# EAGLE board 6502__R8_EXP1 (EAGLE 7.5.0)
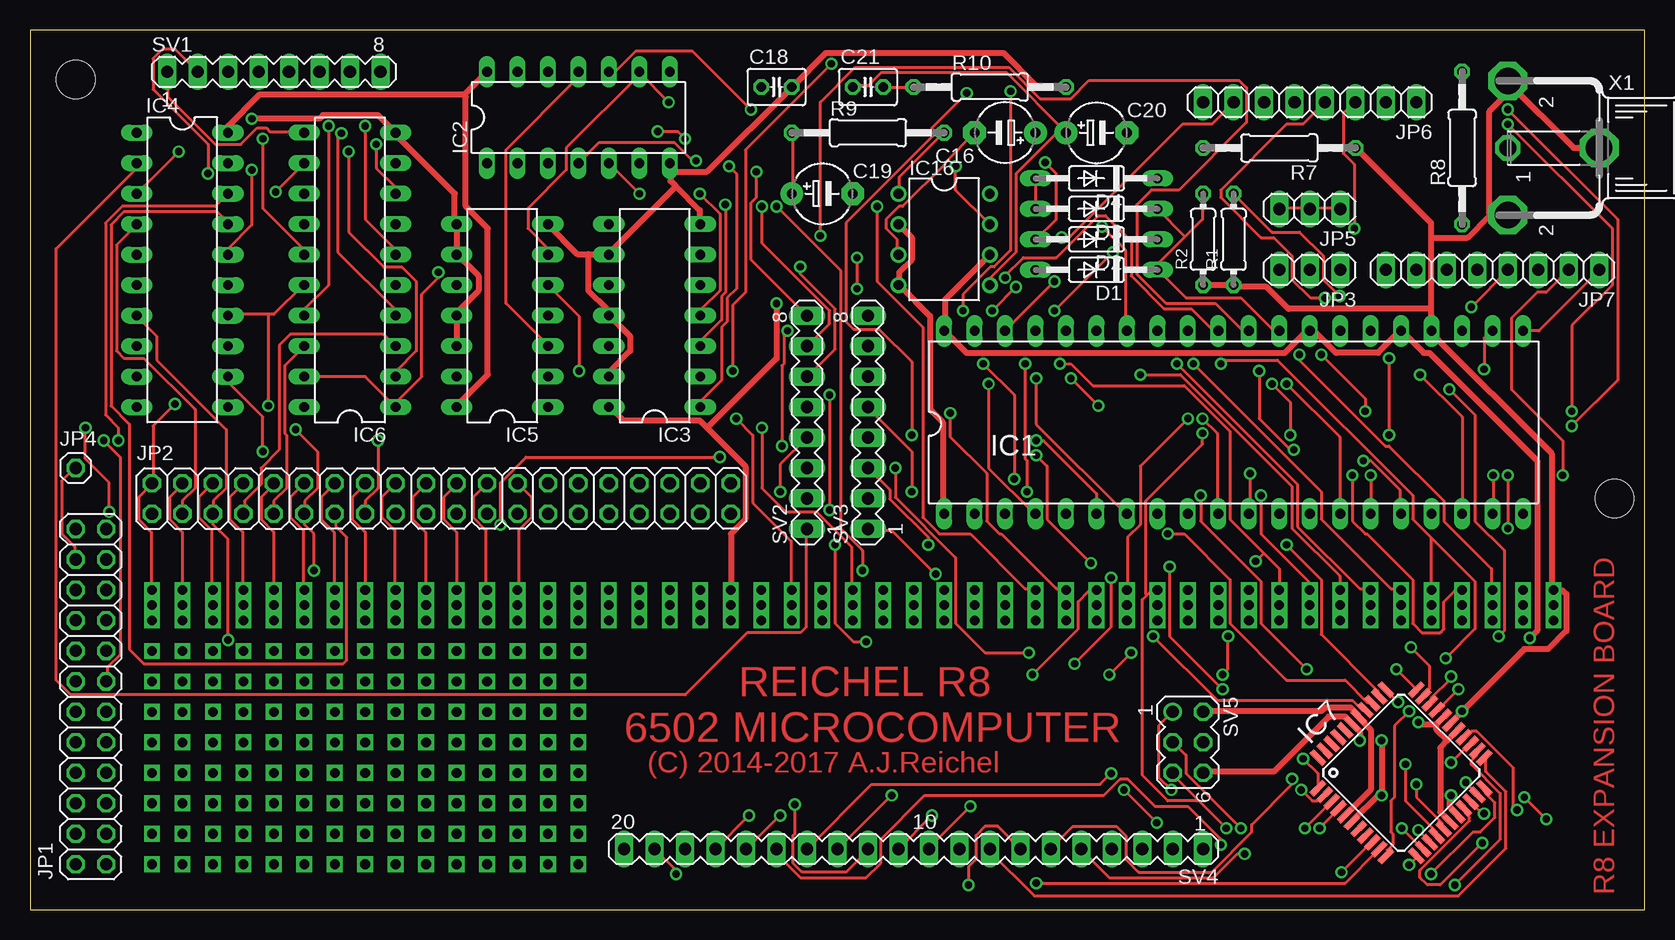
[diagram p0: board, top side]
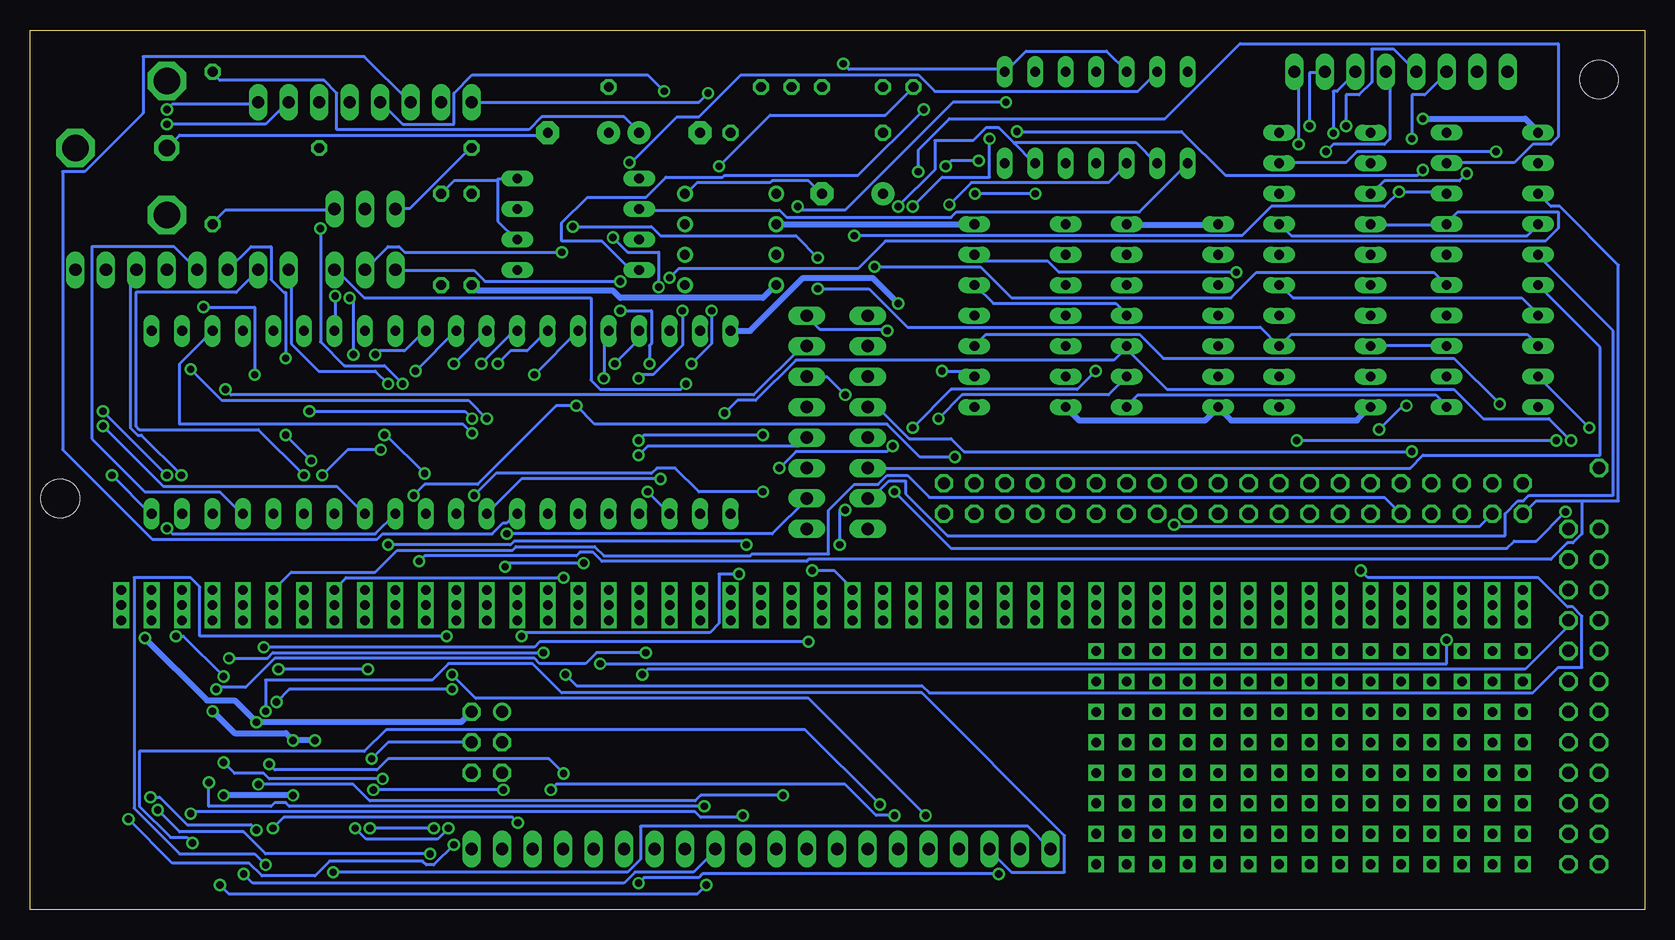
[diagram p1: board, bottom side, seen from below]

Size 134.6 x 73.33 mm. Coordinates in mm from the lower left corner, seen from the top.
Outline: 0,0 134.6,0 134.6,73.33 0,73.33 0,0
Copper layers (1*16): Top 0.035mm / dielectric 1.5mm / Bottom 0.035mm
Design rules "default *": minimum track width 10mil, minimum drill 24mil, track to track 4mil, track to pad 6mil, pad to pad 6mil, via to via 6mil, smd to smd 6mil, copper to edge 40mil, drill to drill 8mil, minimum pad ring 10mil, minimum via ring 8mil, stop-mask expansion 4mil, vias tented up to drill 0mil, thermal gap 10mil
Net classes: 1 Power: width 0.508 mm, drill 0.508 mm, clearance 0.152 mm
Holes 3.2 mm at 3.81,69.22 132.08,34.29

## Footprints (pad centres in the part's own frame; a part is rotated, then mirrored left to right if it is on the bottom)
E5-5 = drill 0.813 pad 1.905: + -2.54,0 | drill 0.813 pad 1.905 octagon: - 2.54,0
C025-030X050 = drill 0.813 octagon: 1 -1.27,0; 2 1.27,0
DO35-10 = drill 0.813 long: A 5.08,0; C -5.08,0
DIL40 = drill 0.813 long: 1 -24.13,-7.62; 2 -21.59,-7.62; 3 -19.05,-7.62; 4 -16.51,-7.62; 5 -13.97,-7.62; 6 -11.43,-7.62; 7 -8.89,-7.62; 8 -6.35,-7.62; 9 -3.81,-7.62; 10 -1.27,-7.62; 11 1.27,-7.62; 12 3.81,-7.62; 13 6.35,-7.62; 14 8.89,-7.62; 15 11.43,-7.62; 16 13.97,-7.62; 17 16.51,-7.62; 18 19.05,-7.62; 19 21.59,-7.62; 20 24.13,-7.62; 21 24.13,7.62; 22 21.59,7.62; 23 19.05,7.62; 24 16.51,7.62; 25 13.97,7.62; 26 11.43,7.62; 27 8.89,7.62; 28 6.35,7.62; 29 3.81,7.62; 30 1.27,7.62; 31 -1.27,7.62; 32 -3.81,7.62; 33 -6.35,7.62; 34 -8.89,7.62; 35 -11.43,7.62; 36 -13.97,7.62; 37 -16.51,7.62; 38 -19.05,7.62; 39 -21.59,7.62; 40 -24.13,7.62
DIL14 = drill 0.813 long: 1 -7.62,-3.81; 2 -5.08,-3.81; 3 -2.54,-3.81; 4 0,-3.81; 5 2.54,-3.81; 6 5.08,-3.81; 7 7.62,-3.81; 8 7.62,3.81; 9 5.08,3.81; 10 2.54,3.81; 11 0,3.81; 12 -2.54,3.81; 13 -5.08,3.81; 14 -7.62,3.81
DIL20 = drill 0.813 long: 1 -11.43,-3.81; 2 -8.89,-3.81; 3 -6.35,-3.81; 4 -3.81,-3.81; 5 -1.27,-3.81; 6 1.27,-3.81; 7 3.81,-3.81; 8 6.35,-3.81; 9 8.89,-3.81; 10 11.43,-3.81; 11 11.43,3.81; 12 8.89,3.81; 13 6.35,3.81; 14 3.81,3.81; 15 1.27,3.81; 16 -1.27,3.81; 17 -3.81,3.81; 18 -6.35,3.81; 19 -8.89,3.81; 20 -11.43,3.81
TQFP44 = smd 1.5 x 0.5: 1 -5.8,4; 2 -5.8,3.2; 3 -5.8,2.4; 4 -5.8,1.6; 5 -5.8,0.8; 6 -5.8,0; 7 -5.8,-0.8; 8 -5.8,-1.6; 9 -5.8,-2.4; 10 -5.8,-3.2; 11 -5.8,-4; 23 5.8,-4; 24 5.8,-3.2; 25 5.8,-2.4; 26 5.8,-1.6; 27 5.8,-0.8; 28 5.8,0; 29 5.8,0.8; 30 5.8,1.6; 31 5.8,2.4; 32 5.8,3.2; 33 5.8,4 | smd 0.5 x 1.5: 12 -4,-5.8; 13 -3.2,-5.8; 14 -2.4,-5.8; 15 -1.6,-5.8; 16 -0.8,-5.8; 17 0,-5.8; 18 0.8,-5.8; 19 1.6,-5.8; 20 2.4,-5.8; 21 3.2,-5.8; 22 4,-5.8; 34 4,5.8; 35 3.2,5.8; 36 2.4,5.8; 37 1.6,5.8; 38 0.8,5.8; 39 0,5.8; 40 -0.8,5.8; 41 -1.6,5.8; 42 -2.4,5.8; 43 -3.2,5.8; 44 -4,5.8
DIL08 = drill 0.813 pad 1.27: 1 -3.81,-3.81; 2 -1.27,-3.81; 3 1.27,-3.81; 4 3.81,-3.81; 5 3.81,3.81; 6 1.27,3.81; 7 -1.27,3.81; 8 -3.81,3.81
2X12 = drill 1.016 octagon: 1 -13.97,-1.27; 2 -13.97,1.27; 3 -11.43,-1.27; 4 -11.43,1.27; 5 -8.89,-1.27; 6 -8.89,1.27; 7 -6.35,-1.27; 8 -6.35,1.27; 9 -3.81,-1.27; 10 -3.81,1.27; 11 -1.27,-1.27; 12 -1.27,1.27; 13 1.27,-1.27; 14 1.27,1.27; 15 3.81,-1.27; 16 3.81,1.27; 17 6.35,-1.27; 18 6.35,1.27; 19 8.89,-1.27; 20 8.89,1.27; 21 11.43,-1.27; 22 11.43,1.27; 23 13.97,-1.27; 24 13.97,1.27
2X20 = drill 1.016 octagon: 1 -24.13,-1.27; 2 -24.13,1.27; 3 -21.59,-1.27; 4 -21.59,1.27; 5 -19.05,-1.27; 6 -19.05,1.27; 7 -16.51,-1.27; 8 -16.51,1.27; 9 -13.97,-1.27; 10 -13.97,1.27; 11 -11.43,-1.27; 12 -11.43,1.27; 13 -8.89,-1.27; 14 -8.89,1.27; 15 -6.35,-1.27; 16 -6.35,1.27; 17 -3.81,-1.27; 18 -3.81,1.27; 19 -1.27,-1.27; 20 -1.27,1.27; 21 1.27,-1.27; 22 1.27,1.27; 23 3.81,-1.27; 24 3.81,1.27; 25 6.35,-1.27; 26 6.35,1.27; 27 8.89,-1.27; 28 8.89,1.27; 29 11.43,-1.27; 30 11.43,1.27; 31 13.97,-1.27; 32 13.97,1.27; 33 16.51,-1.27; 34 16.51,1.27; 35 19.05,-1.27; 36 19.05,1.27; 37 21.59,-1.27; 38 21.59,1.27; 39 24.13,-1.27; 40 24.13,1.27
1X03 = drill 1.016 long: 1 -2.54,0; 2 0,0; 3 2.54,0
1X01 = drill 1.016 octagon: 1 0,0
1X08 = drill 1.016 long: 1 -8.89,0; 2 -6.35,0; 3 -3.81,0; 4 -1.27,0; 5 1.27,0; 6 3.81,0; 7 6.35,0; 8 8.89,0
0204/7 = drill 0.813 octagon: 1 -3.81,0; 2 3.81,0
0207/12 = drill 0.813 octagon: 1 -6.35,0; 2 6.35,0
MA08-1 = drill 1.016 long: 1 -8.89,0; 2 -6.35,0; 3 -3.81,0; 4 -1.27,0; 5 1.27,0; 6 3.81,0; 7 6.35,0; 8 8.89,0
MA20-1 = drill 1.016 long: 1 -24.13,0; 2 -21.59,0; 3 -19.05,0; 4 -16.51,0; 5 -13.97,0; 6 -11.43,0; 7 -8.89,0; 8 -6.35,0; 9 -3.81,0; 10 -1.27,0; 11 1.27,0; 12 3.81,0; 13 6.35,0; 14 8.89,0; 15 11.43,0; 16 13.97,0; 17 16.51,0; 18 19.05,0; 19 21.59,0; 20 24.13,0
MA03-2 = drill 1.016: 1 -2.54,-1.27 | drill 1.016 octagon: 2 -2.54,1.27; 3 0,-1.27; 4 0,1.27; 5 2.54,-1.27; 6 2.54,1.27
SOLDERPAD = drill 0.8 square: P$1 -13.97,6.35; P$2 -11.43,6.35; P$3 -8.89,6.35; P$4 -6.35,6.35; P$5 -3.81,6.35; P$6 -1.27,6.35; P$7 1.27,6.35; P$8 3.81,6.35; P$9 6.35,6.35; P$10 8.89,6.35; P$11 11.43,6.35; P$12 13.97,6.35; P$13 16.51,6.35; P$14 19.05,6.35; P$15 21.59,6.35; P$16 24.13,6.35; P$17 -16.51,6.35; P$18 -19.05,6.35; P$19 -21.59,6.35; P$20 -24.13,6.35; P$21 26.67,6.35; P$22 29.21,6.35; P$23 31.75,6.35; P$24 34.29,6.35; P$25 36.83,6.35; P$26 39.37,6.35; P$27 41.91,6.35; P$28 44.45,6.35; P$29 46.99,6.35; P$30 49.53,6.35; P$31 52.07,6.35; P$32 54.61,6.35; P$33 -24.13,3.81; P$34 -13.97,3.81; P$35 -11.43,3.81; P$36 -8.89,3.81; P$37 -6.35,3.81; P$38 -3.81,3.81; P$39 -1.27,3.81; P$40 1.27,3.81; P$41 3.81,3.81; P$42 6.35,3.81; P$43 8.89,3.81; P$44 11.43,3.81; P$45 13.97,3.81; P$46 16.51,3.81; P$47 19.05,3.81; P$48 21.59,3.81; P$49 24.13,3.81; P$50 -16.51,3.81; P$51 -19.05,3.81; P$52 -21.59,3.81; P$53 26.67,3.81; P$54 29.21,3.81; P$55 31.75,3.81; P$56 34.29,3.81; P$57 36.83,3.81; P$58 39.37,3.81; P$59 41.91,3.81; P$60 44.45,3.81; P$61 46.99,3.81; P$62 49.53,3.81; P$63 52.07,3.81; P$64 54.61,3.81; P$513 -24.13,5.08; P$514 -21.59,5.08; P$515 -19.05,5.08; P$516 -16.51,5.08; P$517 -13.97,5.08; P$518 -11.43,5.08; P$519 -8.89,5.08; P$520 -6.35,5.08; P$521 -3.81,5.08; P$522 -1.27,5.08; P$523 1.27,5.08; P$524 3.81,5.08; P$525 6.35,5.08; P$526 8.89,5.08; P$527 11.43,5.08; P$528 13.97,5.08; P$529 16.51,5.08; P$530 19.05,5.08; P$531 21.59,5.08; P$532 24.13,5.08; P$533 26.67,5.08; P$534 29.21,5.08; P$535 31.75,5.08; P$536 34.29,5.08; P$537 36.83,5.08; P$538 39.37,5.08; P$539 41.91,5.08; P$540 44.45,5.08; P$541 46.99,5.08; P$542 49.53,5.08; P$543 52.07,5.08; P$544 54.61,5.08
SOLDERPAD2 = drill 0.8 square: P$1 -27.94,7.62; P$2 -25.4,7.62; P$3 -22.86,7.62; P$4 -20.32,7.62; P$5 -17.78,7.62; P$6 -15.24,7.62; P$7 -12.7,7.62; P$8 -10.16,7.62; P$9 -7.62,7.62; P$10 -5.08,7.62; P$11 -2.54,7.62; P$12 0,7.62; P$13 2.54,7.62; P$14 5.08,7.62; P$15 7.62,7.62; P$16 -27.94,6.35; P$17 -25.4,6.35; P$18 -22.86,6.35; P$19 -20.32,6.35; P$20 -17.78,6.35; P$21 -15.24,6.35; P$22 -12.7,6.35; P$23 -10.16,6.35; P$24 -7.62,6.35; P$25 -5.08,6.35; P$26 -2.54,6.35; P$27 0,6.35; P$28 2.54,6.35; P$29 5.08,6.35; P$30 7.62,6.35; P$31 -27.94,5.08; P$32 -25.4,5.08; P$33 -22.86,5.08; P$34 -20.32,5.08; P$35 -17.78,5.08; P$36 -15.24,5.08; P$37 -12.7,5.08; P$38 -10.16,5.08; P$39 -7.62,5.08; P$40 -5.08,5.08; P$41 -2.54,5.08; P$42 0,5.08; P$43 2.54,5.08; P$44 5.08,5.08; P$45 7.62,5.08; P$46 -27.94,2.54; P$47 -25.4,2.54; P$48 -22.86,2.54; P$49 -20.32,2.54; P$50 -17.78,2.54; P$51 -15.24,2.54; P$52 -12.7,2.54; P$53 -10.16,2.54; P$54 -7.62,2.54; P$55 -5.08,2.54; P$56 -2.54,2.54; P$57 0,2.54; P$58 2.54,2.54; P$59 5.08,2.54; P$60 7.62,2.54; P$61 -27.94,0; P$62 -25.4,0; P$63 -22.86,0; P$64 -20.32,0; P$65 -17.78,0; P$66 -15.24,0; P$67 -12.7,0; P$68 -10.16,0; P$69 -7.62,0; P$70 -5.08,0; P$71 -2.54,0; P$72 0,0; P$73 2.54,0; P$74 5.08,0; P$75 7.62,0; P$76 -27.94,-2.54; P$77 -25.4,-2.54; P$78 -22.86,-2.54; P$79 -20.32,-2.54; P$80 -17.78,-2.54; P$81 -15.24,-2.54; P$82 -12.7,-2.54; P$83 -10.16,-2.54; P$84 -7.62,-2.54; P$85 -5.08,-2.54; P$86 -2.54,-2.54; P$87 0,-2.54; P$88 2.54,-2.54; P$89 5.08,-2.54; P$90 7.62,-2.54; P$91 -27.94,-5.08; P$92 -25.4,-5.08; P$93 -22.86,-5.08; P$94 -20.32,-5.08; P$95 -17.78,-5.08; P$96 -15.24,-5.08; P$97 -12.7,-5.08; P$98 -10.16,-5.08; P$99 -7.62,-5.08; P$100 -5.08,-5.08; P$101 -2.54,-5.08; P$102 0,-5.08; P$103 2.54,-5.08; P$104 5.08,-5.08; P$105 7.62,-5.08; P$106 -27.94,-7.62; P$107 -25.4,-7.62; P$108 -22.86,-7.62; P$109 -20.32,-7.62; P$110 -17.78,-7.62; P$111 -15.24,-7.62; P$112 -12.7,-7.62; P$113 -10.16,-7.62; P$114 -7.62,-7.62; P$115 -5.08,-7.62; P$116 -2.54,-7.62; P$117 0,-7.62; P$118 2.54,-7.62; P$119 5.08,-7.62; P$120 7.62,-7.62; P$121 -27.94,-10.16; P$122 -25.4,-10.16; P$123 -22.86,-10.16; P$124 -20.32,-10.16; P$125 -17.78,-10.16; P$126 -15.24,-10.16; P$127 -12.7,-10.16; P$128 -10.16,-10.16; P$129 -7.62,-10.16; P$130 -5.08,-10.16; P$131 -2.54,-10.16; P$132 0,-10.16; P$133 2.54,-10.16; P$134 5.08,-10.16; P$135 7.62,-10.16; P$136 -27.94,-12.7; P$137 -25.4,-12.7; P$138 -22.86,-12.7; P$139 -20.32,-12.7; P$140 -17.78,-12.7; P$141 -15.24,-12.7; P$142 -12.7,-12.7; P$143 -10.16,-12.7; P$144 -7.62,-12.7; P$145 -5.08,-12.7; P$146 -2.54,-12.7; P$147 0,-12.7; P$148 2.54,-12.7; P$149 5.08,-12.7; P$150 7.62,-12.7; P$151 -27.94,-15.24; P$152 -25.4,-15.24; P$153 -22.86,-15.24; P$154 -20.32,-15.24; P$155 -17.78,-15.24; P$156 -15.24,-15.24; P$157 -12.7,-15.24; P$158 -10.16,-15.24; P$159 -7.62,-15.24; P$160 -5.08,-15.24; P$161 -2.54,-15.24; P$162 0,-15.24; P$163 2.54,-15.24; P$164 5.08,-15.24; P$165 7.62,-15.24
TOBU3 = drill 1.397 octagon: 1 0,-2.54 | drill 2.21 octagon: 2 5.588,-2.54; 2@1 -5.588,-2.54; 2@2 0,5.08

## Placement (x,y rotation side)
C16  1u  [E5-5]  81.28,64.77 180 top
C18  100n  [C025-030X050]  62.23,68.58 0 top
C19  10u  [E5-5]  66.04,59.69 0 top
C20  220u  [E5-5]  88.9,64.77 0 top
C21  47n  [C025-030X050]  69.85,68.58 0 top
D1  1N4148DO35-10  [DO35-10]  88.9,53.34 180 top
D2  1N4148DO35-10  [DO35-10]  88.9,55.88 180 top
D3  1N4148DO35-10  [DO35-10]  88.9,58.42 180 top
D4  1N4148DO35-10  [DO35-10]  88.9,60.96 180 top
IC1  [DIL40]  100.33,40.64 0 top
IC2  74HCT02N  [DIL14]  45.72,66.04 0 top
IC3  74HCT04N  [DIL14]  52.07,49.53 90 top
IC4  74HCT373N  [DIL20]  12.7,53.34 270 top
IC5  74HCT02N  [DIL14]  39.37,49.53 90 top
IC6  74HCT244N  [DIL20]  26.67,53.34 90 top
IC7  MEGA32-A  [TQFP44]  114.3,11.43 45 top
IC16  LM386N-3  [DIL08]  76.2,55.88 270 top
JP1  [2X12]  5.08,17.78 90 top
JP2  [2X20]  34.29,34.29 0 top
JP3  [1X03]  106.68,53.34 180 top
JP4  [1X01]  3.81,36.83 0 top
JP5  [1X03]  106.68,58.42 180 top
JP6  [1X08]  106.68,67.31 180 top
JP7  [1X08]  121.92,53.34 180 top
R1  [0204/7]  100.33,55.88 90 top
R2  [0204/7]  97.79,55.88 90 top
R7  1k  [0207/12]  104.14,63.5 180 top
R8  10k  [0207/12]  119.38,63.5 90 top
R9  1k2  [0207/12]  69.85,64.77 0 top
R10  10R  [0207/12]  80.01,68.58 0 top
SV1  [MA08-1]  20.32,69.85 0 top
SV2  [MA08-1]  64.77,40.64 90 top
SV3  [MA08-1]  69.85,40.64 90 top
SV4  [MA20-1]  73.66,5.08 180 top
SV5  [MA03-2]  96.52,13.97 270 top
U$2  SOLDERPAD  [SOLDERPAD]  72.39,20.32 0 top
U$3  SOLDERPAD2  [SOLDERPAD2]  38.1,19.05 0 top
X1  TOBU3  [TOBU3]  125.73,63.5 270 top

## Library data of the parts
C16 C18-C21 R1 R2 R7-R10 = rcl
D1-D4 = diode
IC1 = 8Bit_Parts
IC2-IC6 = 74xx-eu
IC7 = atmel; MPN: ATMEGA32-16AU; OC_FARNELL: 9171274; OC_NEWARK: 69K6677
IC16 = linear
JP1-JP7 = pinhead
SV1-SV5 = con-lstb; OC_FARNELL: unknown; OC_NEWARK: unknown
U$2 = logik2
U$3 = logik
X1 = logik2; MF: FARNELL; MPN: TOBU 3; OC_FARNELL: 592791; OC_NEWARK: 06WX5914

## Nets
!BE: U$2.P$21
!IOSEL2: U$2.P$31
!ML: U$2.P$19
!READ: IC2.9 IC5.6 U$2.P$11
!RESET: IC1.23 IC7.4 SV5.5 U$2.P$15
!VP: U$2.P$20
!VRAM: JP1.22 JP4.1
!WRITE: IC2.11 IC5.3 JP1.13 U$2.P$12
A0: IC2.3 IC3.3 JP2.2 U$3.P$1
A1: JP2.4 U$3.P$2
A2: JP2.6 U$3.P$3
A3: JP2.8 U$3.P$4
A4: JP2.10 U$3.P$5
A5: JP2.12 U$3.P$6
A6: JP2.14 U$3.P$7
A7: JP2.16 U$3.P$8
A8: JP2.18 U$3.P$9
A9: JP2.20 U$3.P$10
A10: JP2.22 U$3.P$11
A11: JP2.24 U$3.P$12
A12: JP2.26 U$3.P$13
A13: U$3.P$14
A14: U$3.P$15
CPSP: U$2.P$18
D0: IC1.37 IC4.3 IC6.9 JP2.1 U$2.P$23
D1: IC1.36 IC4.4 IC6.7 JP2.3 U$2.P$24
D2: IC1.35 IC4.7 IC6.5 JP2.5 U$2.P$25
D3: IC1.34 IC4.8 IC6.3 JP2.7 U$2.P$26
D4: IC1.33 IC4.13 IC6.18 JP2.9 U$2.P$27
D5: IC1.32 IC4.14 IC6.16 JP2.11 U$2.P$28
D6: IC1.31 IC4.17 IC6.14 JP2.13 U$2.P$29
D7: IC1.30 IC4.18 IC6.12 JP2.15 U$2.P$30
GND: IC4.10
IO0: IC5.2 U$2.P$3
IO1: IC2.2 IC2.6 U$2.P$4
IO2: IC5.5 U$2.P$5
IO3: U$2.P$6
IO5: U$2.P$7
IO7: U$2.P$8
IO_SEL: U$2.P$2
IRQ2: U$2.P$9
IRQ3: U$2.P$10
N$1: IC4.11 IC5.1
N$2: IC6.11 SV1.1
N$3: IC2.5 IC3.4
N$4: IC2.4 IC3.1
N$5: IC2.8 IC2.12 IC3.2
N$6: IC6.13 SV1.2
N$7: D3.A D4.A IC2.1
N$8: D1.C D3.C IC1.29 R2.2
N$9: D2.C D4.C IC1.27 R1.2
N$10: D1.A IC2.10
N$11: D2.A IC2.13
N$12: IC6.15 SV1.3
N$13: IC6.17 SV1.4
N$14: IC6.2 SV1.5
N$15: IC6.4 SV1.6
N$16: IC6.6 SV1.7
N$17: IC6.8 SV1.8
N$18: IC3.5 IC5.4
N$19: IC3.6 IC6.1 IC6.19
N$20: IC4.2 SV2.1
N$21: IC4.5 SV2.2
N$22: IC4.6 SV2.3
N$23: IC4.9 SV2.4
N$24: IC4.12 SV2.5
N$25: IC4.15 SV2.6
N$26: IC4.16 SV2.7
N$27: IC4.19 SV2.8
N$28: IC1.4 JP3.1
N$29: IC1.3 JP3.2
N$30: IC1.38 JP3.3
N$31: IC1.13 JP6.1
N$32: IC7.37 SV3.1
N$33: IC7.36 SV3.2
N$34: IC7.35 SV3.3
N$35: IC7.9 SV4.20
N$36: IC7.10 SV4.19
N$37: IC7.11 SV4.18
N$38: IC7.12 SV4.17
N$39: IC7.13 SV4.16
N$40: IC7.14 SV4.15
N$41: IC7.15 SV4.14
N$42: IC7.16 SV4.13
N$43: IC7.19 SV4.12
N$44: IC7.20 SV4.11
N$45: IC7.21 SV4.10
N$46: IC7.22 SV4.9
N$47: IC7.23 SV4.8
N$48: IC7.24 SV4.7
N$49: IC7.25 SV4.6
N$50: IC7.26 SV4.5
N$51: IC7.2 SV5.1
N$52: IC7.3 SV5.3
N$53: IC7.34 SV3.4
N$54: IC7.1 SV5.4
N$55: IC7.33 SV3.5
N$56: IC7.32 SV3.6
N$57: IC7.31 SV3.7
N$58: IC7.30 SV3.8
N$59: IC1.12 JP6.2
N$60: IC1.11 JP6.3
N$61: IC1.10 JP6.4
N$62: IC1.9 JP6.5
N$63: IC1.8 JP6.6
N$64: IC1.7 JP6.7
N$65: IC1.6 JP6.8
N$66: IC1.21 JP7.1
N$67: IC1.20 JP7.2
N$68: IC1.19 JP7.3
N$69: IC1.18 JP7.4
N$70: IC1.17 JP7.5
N$71: IC1.16 JP7.6
N$72: IC1.15 JP7.7
N$73: IC1.14 JP7.8
N$114: JP5.1 JP5.2 JP5.3 R7.2 R8.1
N$115: C16.+ R8.2
N$116: C16.- IC16.3
N$117: C18.1 IC16.7
N$126: C19.- IC16.8
N$127: IC16.1 R9.2
N$128: C19.+ R9.1
N$129: C20.- X1.1
N$130: C20.+ C21.1 IC16.5
N$133: C21.2 R10.1
PHI1: U$2.P$22
PHI2: IC1.22 U$2.P$14
READY: U$2.P$17
RWB: JP1.17 U$2.P$13
SYNC: U$2.P$16
VCC [Power]: IC1.25 IC1.28 IC1.40 IC2.14 IC3.14 IC4.20 IC5.14 IC6.20 IC7.5 IC7.17 IC7.27 IC7.29 IC7.38 IC16.6 SV5.2 U$2.P$1
VSS [Power]: C18.2 IC1.1 IC1.24 IC2.7 IC3.7 IC3.9 IC3.11 IC3.13 IC4.1 IC5.7 IC5.8 IC5.9 IC5.11 IC5.12 IC6.10 IC7.6 IC7.18 IC7.28 IC7.39 IC16.2 IC16.4 R1.1 R2.1 R7.1 R10.2 SV5.6 U$2.P$32 X1.2 X1.2@1 X1.2@2

## Tracks (layer width: path | path; a pad name or v marks a point on that pad's centre or on a via)
!READ  (via drill 0.61)
  Top 0.254: v70.61,58.62 70.61,52.38 74.42,48.57 74.42,32.72 75.79,31.34 78.38,31.34 82.96,26.77 83.72,26.77 U$2.P$11 | v53.24,67.31 50.8,69.75 IC2.9 50.8,69.6 44.7,63.5 44.7,61.67 41.5,58.47 41.5,56.79 43.18,55.12 IC5.6
  Bottom 0.254: v70.61,58.62 70.31,58.32 66.65,58.32 57.66,67.31 v53.24,67.31
!RESET  (via drill 0.61)
  Top 0.254: v107.49,6.81 109.02,8.33 IC7.4 | 97.36,9.17 95.15,11.38 SV5.5 | 97.36,9.17 v99.72,6.81 | 93.09,26.24 92.71,25.86 92.71,11.23 94.84,9.09 97.28,9.09 97.36,9.17 | 93.09,26.24 93.47,26.62 93.93,26.62 U$2.P$15 | v97.74,39.73 97.74,38.81 93.02,34.09 93.02,26.31 93.09,26.24
  Bottom 0.254: v107.49,6.81 106.58,5.89 100.64,5.89 v99.72,6.81 | IC1.23 122.12,45.52 122.12,40.49 98.5,40.49 v97.74,39.73
!VRAM
  Top 0.254: JP1.22 3.71,29.21 3.71,30.28 2.64,31.34 2.64,35.76 3.71,36.83 JP4.1
!WRITE  (via drill 0.61)
  Top 0.254: v76.71,41.4 76.71,39.42 79.76,36.37 79.76,32.41 80.82,31.34 80.97,31.34 85.55,26.77 86.31,26.77 U$2.P$12 | IC2.11 45.62,69.75 45.62,69.29 39.67,63.35 39.67,50.55 43.18,47.04 IC5.3 | v6.15,39.12 7.52,37.74 7.52,21.29 6.45,20.22 6.45,19.15 JP1.13
  Bottom 0.254: v76.71,41.4 75.64,42.47 74.12,42.47 70.76,45.82 44.25,45.82 43.18,46.89 IC5.3 43.18,46.74 39.83,43.38 15.9,43.38 13.46,40.95 7.98,40.95 v6.15,39.12
A0  (via drill 0.61)
  Top 0.254: U$3.P$1 10.11,26.77 10.11,31.5 9.04,32.56 9.04,34.39 10.11,35.46 JP2.2 10.26,35.61 10.26,40.34 v12.09,42.16 | v57.96,58.78 57.96,51.46 57.66,51.16 57.66,49.17 55.98,47.5 55.98,47.04 IC3.3
  Bottom 0.254: v57.96,58.78 56.13,60.6 44.7,60.6 43.18,62.13 IC2.3 | v12.09,42.16 15.9,45.97 40.13,45.97 42.11,47.96 54.91,47.96 IC3.3
A1
  Top 0.254: U$3.P$2 12.7,31.5 11.63,32.56 11.63,34.39 12.7,35.46 JP2.4
A2
  Top 0.254: JP2.6 14.07,34.39 14.07,32.72 15.14,31.65 15.14,26.77 U$3.P$3
A3
  Top 0.254: U$3.P$4 17.73,26.77 17.73,31.5 16.66,32.56 16.66,34.39 17.73,35.46 JP2.8
A4
  Top 0.254: U$3.P$5 20.32,31.5 19.25,32.56 19.25,34.39 20.32,35.46 JP2.10
A5
  Top 0.254: JP2.12 21.69,34.39 21.69,32.72 22.76,31.65 22.76,26.77 U$3.P$6
A6
  Top 0.254: U$3.P$7 25.35,26.77 25.35,31.5 24.28,32.56 24.28,34.39 25.35,35.46 JP2.14
A7
  Top 0.254: U$3.P$8 27.94,31.5 26.87,32.56 26.87,34.39 27.94,35.46 JP2.16
A8
  Top 0.254: JP2.18 29.31,34.39 29.31,32.72 30.38,31.65 30.38,26.77 U$3.P$9
A9
  Top 0.254: U$3.P$10 32.97,26.77 32.97,31.5 31.9,32.56 31.9,34.39 32.97,35.46 JP2.20
A10
  Top 0.254: U$3.P$11 35.56,31.5 34.49,32.56 34.49,34.39 35.56,35.46 JP2.22
A11
  Top 0.254: JP2.24 36.93,34.39 36.93,32.72 38,31.65 38,26.77 U$3.P$12
A12
  Top 0.254: JP2.26 41.81,34.39 41.81,32.72 40.74,31.65 40.74,26.77 U$3.P$13
D0  (via drill 0.61)
  Top 0.254: U$2.P$23 104.14,28.45 102.84,29.74 | 102.84,29.74 100.02,32.56 100.02,39.88 96.22,43.69 88.59,43.69 86.77,45.52 v85.85,45.52 | IC4.3 v12.39,63.2 | v102.16,29.06 102.84,29.74
  Bottom 0.254: v85.85,45.52 83.87,47.5 83.87,48.26 IC1.37 | IC4.3 7.82,58.62 7.06,58.62 2.18,53.75 2.18,34.09 5.23,34.09 | 5.23,34.09 9.04,34.09 10.11,33.02 JP2.1 | v12.39,63.2 23.98,63.2 24.89,62.28 30.38,62.28 IC6.9 | v102.16,29.06 101.7,29.52 89.05,29.52 88.75,29.82 87.68,29.82 86.92,29.06 69.85,29.06 69.7,29.21 7.82,29.21 6.45,30.58 5.99,30.58 5.23,31.34 5.23,34.09
D1  (via drill 0.61)
  Top 0.254: v102.62,34.54 102.62,31.34 106.58,27.38 106.58,26.77 U$2.P$24 | v86.77,44.3 v89.05,42.01 | JP2.3 12.7,34.09 13.77,35.15 13.77,41.71 9.5,45.97 7.82,45.97 7.21,46.58 7.21,55.42 8.89,57.1 IC4.4 | v57.51,37.74 41.35,37.74 39.22,35.61 v39.22,32.11
  Bottom 0.254: v102.62,34.54 101.7,35.46 97.28,35.46 90.73,42.01 v89.05,42.01 87.53,40.49 63.14,40.49 60.4,37.74 v57.51,37.74 | v86.77,44.3 86.77,48.26 IC1.36 | IC4.4 8.89,57.1 9.8,56.19 29.46,56.19 30.38,57.1 IC6.7 | v39.22,32.11 39.06,31.95 13.77,31.95 JP2.3
D2  (via drill 0.61)
  Top 0.254: 15.29,33.02 15.29,34.09 16.36,35.15 16.36,40.03 10.57,45.82 10.57,47.8 8.89,49.48 IC4.7 | v92.56,44.6 95.91,44.6 105.21,35.31 105.21,31.8 109.17,27.84 109.17,26.77 U$2.P$25 | 15.29,33.02 15.29,32.11 16.51,30.89 v16.51,22.5 | v87.07,20.52 90.12,23.57 v90.12,27.69 | 15.29,33.02 JP2.5
  Bottom 0.254: IC4.7 8.89,49.63 10.26,51 29.31,51 30.38,52.07 IC6.5 | IC1.35 v92.56,44.6 | v16.51,22.5 16.51,20.52 v87.07,20.52 | v90.12,27.69 108.25,27.69 109.17,26.77 U$2.P$25
D3  (via drill 0.61)
  Top 0.254: JP2.7 17.88,33.02 17.88,34.09 19.25,35.46 19.25,36.83 20.78,38.35 20.78,47.04 21.69,47.96 29.46,47.96 30.38,47.04 IC6.3 | v95.61,45.52 105.66,35.46 105.66,31.95 110.85,26.77 111.76,26.77 U$2.P$26 | v68.94,54.36 v68.94,51.77 | v89.36,56.95 91.34,54.97 91.34,48.26 IC1.34
  Bottom 0.254: IC4.8 8.89,47.04 9.8,47.96 29.46,47.96 30.38,47.04 IC6.3 32.05,48.57 61.47,48.57 64.67,51.77 v68.94,51.77 | v95.61,45.52 94.54,46.58 93.17,46.58 91.49,48.26 IC1.34 | v68.94,54.36 70.76,56.19 82.04,56.19 82.8,56.95 v89.36,56.95
D4  (via drill 0.61)
  Top 0.254: JP2.9 20.32,34.09 21.39,35.15 21.39,39.57 21.23,39.73 21.23,45.36 IC6.18 | v96.98,45.52 107.64,34.85 107.64,32.56 113.44,26.77 114.2,26.77 U$2.P$27
  Bottom 0.254: IC4.13 16.51,47.04 22.76,47.04 IC6.18 | v96.98,45.52 94.23,48.26 IC1.33 | JP2.9 21.69,34.39 59.64,34.39 61.47,36.22 63.14,36.22 63.91,35.46 65.89,35.46 68.02,33.33 68.02,29.67 74.42,29.67 74.57,29.52 86.77,29.52 87.53,30.28 94.08,30.28 94.39,29.97 103.99,29.97 105.82,28.14 112.83,28.14 U$2.P$27
D5  (via drill 0.61)
  Top 0.254: 19.86,49.63 20.32,49.63 22.76,52.07 IC6.16 | 19.86,49.63 16.51,49.63 IC4.14 | 22.91,33.02 22.91,34.09 23.98,35.15 23.98,38.2 v22.15,40.03 | 19.86,49.63 v19.86,42.01 | 116.79,31.04 116.79,26.77 U$2.P$28 | 116.79,31.04 115.27,32.56 115.27,34.54 103.99,45.82 99.57,45.82 v99.26,45.52 | 22.91,33.02 22.91,32.11 23.67,31.34 v23.67,28.3 | v91.8,21.44 v89.97,19.61 | v118.01,20.98 120.45,23.42 120.45,27.38 116.79,31.04 | 22.91,33.02 JP2.11
  Bottom 0.254: v22.15,40.03 20.17,42.01 v19.86,42.01 | IC1.32 v99.26,45.52 | v23.67,28.3 23.06,27.69 8.89,27.69 6.45,25.25 5.99,25.25 5.23,24.49 5.23,20.22 7.21,20.22 9.35,18.09 59.64,18.09 60.25,18.69 89.05,18.69 v89.97,19.61 | v91.8,21.44 114.35,21.44 114.81,20.98 v118.01,20.98
D6  (via drill 0.61)
  Top 0.254: v110.24,36.22 110.24,32.41 111.3,31.34 111.45,31.34 115.27,27.53 115.27,23.88 116.03,23.11 117.55,23.11 117.86,23.42 117.86,25.71 118.77,26.62 119.38,26.62 U$2.P$29 | v105.36,38.35 105.05,38.35 102.46,40.95 v102.46,44.91 | JP2.13 25.5,33.02 25.5,31.95 26.42,31.04 26.42,20.83 26.11,20.52 9.5,20.52 8.28,21.74 8.28,40.49 6.76,42.01 6.76,57.1 7.82,58.17 15.6,58.17 16.51,57.25 IC4.17 | IC1.31 98.65,48.26 96.83,50.09 94.54,50.09 91.8,52.83 91.8,55.73 89.66,57.86 89.05,57.86 85.55,54.36 82.8,54.36 81.28,52.83 v81.28,52.68
  Bottom 0.254: v110.24,36.22 108.1,38.35 v105.36,38.35 | v102.46,44.91 99.11,48.26 IC1.31 | IC6.14 22.76,57.1 16.51,57.1 IC4.17 16.51,57.25 15.6,58.17 7.21,58.17 7.21,56.79 8.28,55.73 63.3,55.73 65.58,53.44 80.52,53.44 v81.28,52.68
D7  (via drill 0.61)
  Top 0.254: v105.82,46.28 105.82,45.82 112.98,38.66 113.28,38.66 117.86,34.09 117.86,32.41 121.82,28.45 121.82,26.77 U$2.P$30 | IC6.12 v20.47,59.84 | JP2.15 27.94,34.09 29.01,35.15 v29.01,39.12 | v7.37,39.12 7.37,40.18 6.3,41.25 6.3,57.25 7.67,58.62 15.44,58.62 IC4.18 | IC1.30 101.09,48.26 98.81,50.55 94.69,50.55 92.25,52.98 92.25,58.78 93.47,60 95.76,60 101.4,65.63 101.4,68.53 100.79,69.14 88.29,69.14 86.77,67.62 84.18,67.62 81.58,70.21 68.78,70.21 65.89,67.31 v65.89,56.19
  Bottom 0.254: v105.82,46.28 105.51,46.58 103.38,46.58 101.7,48.26 IC1.30 | IC4.18 16.66,59.84 v20.47,59.84 21.69,58.62 31.14,58.62 33.58,56.19 v65.89,56.19 | v7.37,39.12 v29.01,39.12
IO0  (via drill 0.61)
  Top 0.254: v58.88,40.95 60.25,39.57 60.25,33.93 63.45,30.73 63.45,26.77 U$2.P$3
  Bottom 0.254: v58.88,40.95 56.9,42.93 44.7,42.93 IC5.2
IO1  (via drill 0.61)
  Top 0.254: v69.39,28.3 69.39,29.97 67.56,31.8 67.56,53.29 v62.23,58.62
  Bottom 0.254: v69.39,28.3 67.56,28.3 66.04,26.77 U$2.P$4 | v62.23,58.62 59.18,61.67 59.18,64.11 55.98,64.11 54.91,65.18 53.85,65.18 52.55,63.88 | 52.55,63.88 50.95,62.28 50.8,62.28 IC2.6 | IC2.2 40.74,62.28 42.42,63.96 52.48,63.96 52.55,63.88
IO2  (via drill 0.61)
  Top 0.254: v61.01,40.18 61.01,35.15 62.99,33.17 65.58,33.17 68.48,30.28 68.48,26.77 U$2.P$5 | v45.77,44.91 45.77,49.48 IC5.5
  Bottom 0.254: v61.01,40.18 57.81,43.38 47.3,43.38 v45.77,44.91
N$1
  Bottom 0.254: IC4.11 16.51,42.01 17.42,42.93 42.27,42.93 43.18,42.01 IC5.1
N$2
  Top 0.254: IC6.11 22.76,64.87 20.02,64.87 19.71,65.18 18.95,65.18 17.58,63.81 15.44,63.81 11.48,67.77 11.48,69.75 SV1.1
N$3  (via drill 0.61)
  Top 0.254: v55.83,59.69 57.51,58.01 57.51,51.61 55.98,50.09 55.98,49.63 IC3.4 | IC2.5 v50.8,59.69
  Bottom 0.254: v50.8,59.69 v55.83,59.69
N$4  (via drill 0.61)
  Top 0.254: v58.27,61.98 58.88,61.37 58.88,51.77 58.11,51 58.11,49.02 57.66,48.57 57.66,44.15 55.98,42.47 55.98,42.01 IC3.1 | v55.52,62.43 55.22,62.43 53.7,63.96 47.45,63.96 IC2.4
  Bottom 0.254: v58.27,61.98 57.81,62.43 v55.52,62.43
N$5  (via drill 0.61)
  Top 0.254: v58.57,44.91 58.57,50.39 59.64,51.46 59.64,63.35 v66.8,70.51
  Bottom 0.254: IC2.12 43.18,69.9 44.86,71.58 51.56,71.58 53.24,69.9 IC2.8 53.24,70.05 66.34,70.05 v66.8,70.51 | v58.57,44.91 56.44,44.91 55.98,44.45 IC3.2
N$6  (via drill 0.61)
  Top 0.254: v14.83,61.37 14.83,63.81 10.26,68.38 10.26,70.97 11.02,71.73 12.09,71.73 SV1.2
  Bottom 0.254: v14.83,61.37 15.44,60.76 21.69,60.76 22.76,59.69 IC6.13
N$7
  Top 0.254: D4.A 83.87,60.91 83.87,58.47 D3.A
  Bottom 0.254: IC2.1 38.15,62.13 42.11,58.17 57.35,58.17 57.81,57.71 71.53,57.71 72.14,58.32 83.72,58.32 D3.A
N$8
  Top 0.254: 96.29,56.11 97.74,57.56 97.74,59.69 R2.2 | 96.29,56.11 94.08,53.9 94.08,53.44 D1.C 94.08,53.29 96.37,51 100.94,51 103.68,48.26 IC1.29 | 96.29,56.11 D3.C
N$9  (via drill 0.61)
  Top 0.254: v109.17,51.16 107.8,52.53 107.8,54.51 105.82,56.49 103.53,56.49 R1.2
  Bottom 0.254: 95.61,60.76 95.61,60.91 94.08,60.91 D4.C | 95.61,60.76 95.61,57.4 94.08,55.88 D2.C | R1.2 99.26,60.76 95.61,60.76 | v109.17,51.16 109.17,48.26 IC1.27
N$10  (via drill 0.61)
  Top 0.254: v60.1,66.7 55.22,71.58 50.49,71.58 48.82,69.9 48.36,69.9 IC2.10
  Bottom 0.254: v60.1,66.7 65.58,61.21 76.71,61.21 76.86,61.06 81.58,61.06 83.26,59.39 88.14,59.39 90.27,57.25 90.27,55.73 86.92,55.73 84.63,53.44 83.87,53.44 D1.A
N$11  (via drill 0.61)
  Top 0.254: v84.63,62.28 85.55,61.37 85.55,57.56 83.87,55.88 D2.A
  Bottom 0.254: IC2.13 42.27,68.22 59.18,68.22 60.55,69.6 75.34,69.6 78.84,66.09 80.67,66.09 84.48,62.28 v84.63,62.28
N$12  (via drill 0.61)
  Top 0.254: v19.41,64.26 19.41,58.47 22.76,55.12 22.76,54.66 IC6.15
  Bottom 0.254: v19.41,64.26 19.41,67.92 18.34,67.92 16.51,69.75 SV1.3
N$13  (via drill 0.61)
  Top 0.254: v24.89,65.33 24.89,52.07 22.91,50.09 22.91,49.63 IC6.17
  Bottom 0.254: v24.89,65.33 24.89,67.92 23.83,67.92 22.76,68.99 22.76,71.73 20.93,71.73 SV1.4
N$14  (via drill 0.61)
  Top 0.254: v26.57,63.2 26.57,56.49 29.46,53.59 30.99,53.59 32.21,52.38 32.21,46.58 30.53,44.91 30.53,44.45 IC6.2
  Bottom 0.254: v26.57,63.2 25.96,63.81 21.69,63.81 21.23,64.26 21.23,69.75 21.54,69.75 SV1.5
N$15  (via drill 0.61)
  Top 0.254: v25.96,64.72 25.65,64.41 25.65,54.81 30.38,50.09 30.38,49.63 IC6.4
  Bottom 0.254: v25.96,64.72 25.96,68.22 25.65,68.22 24.13,69.75 SV1.6
N$16  (via drill 0.61)
  Top 0.254: v27.94,65.33 27.94,57.56 30.38,55.12 30.38,54.66 IC6.6
  Bottom 0.254: v27.94,65.33 27.94,69.75 26.72,69.75 SV1.7
N$17  (via drill 0.61)
  Top 0.254: v28.85,63.81 28.85,61.82 30.38,60.3 30.38,59.69 IC6.8
  Bottom 0.254: v28.85,63.81 28.85,69.75 29.16,69.75 SV1.8
N$18
  Bottom 0.254: IC5.4 43.18,49.63 44.09,50.55 54.3,50.55 55.83,52.07 IC3.5
N$19  (via drill 0.61)
  Top 0.254: IC6.19 27.94,44.45 IC6.1 30.38,42.16 32.66,44.45 32.66,51.31 34.04,52.68 v34.04,53.14
  Bottom 0.254: v34.04,53.14 48.82,53.14 49.73,54.05 55.37,54.05 55.83,54.51 IC3.6
N$20
  Top 0.254: IC4.2 8.89,61.82 2.18,55.12 2.18,19.15 3.4,17.93 54.61,17.93 59.79,23.11 64.21,23.11 64.67,23.57 64.67,31.65 SV2.1
N$21
  Bottom 0.254: IC4.5 8.89,54.51 2.64,48.26 2.64,34.54 9.65,34.54 10.11,34.09 10.57,34.09 11.63,33.02 11.63,31.19 58.11,31.19 61.62,34.7 61.62,35.76 62.99,35.76 64.36,34.39 64.67,34.39 SV2.2
N$22
  Bottom 0.254: IC4.6 3.71,46.89 3.71,37.9 18.49,37.9 19.56,36.83 SV2.3
N$23  (via drill 0.61)
  Top 0.254: v4.62,40.18 4.62,37.59 6.6,35.61 v6.6,33.17 | v62.53,34.85 62.53,37.14 SV2.4
  Bottom 0.254: v4.62,40.18 IC4.9 | v6.6,33.17 9.04,30.73 10.87,30.73 11.48,30.12 57.81,30.12 v62.53,34.85
N$24  (via drill 0.61)
  Top 0.254: IC4.12 16.51,43.99 19.41,41.1 v19.41,38.2
  Bottom 0.254: v19.41,38.2 56.74,38.2 57.81,39.27 61.32,39.27 63.91,41.86 64.67,41.86 SV2.5
N$25  (via drill 0.61)
  Top 0.254: v64.21,53.59 64.21,52.98 67.11,50.09 67.11,46.74 64.82,44.45 SV2.6
  Bottom 0.254: IC4.15 17.58,53.14 32.36,53.14 34.49,51 52.78,51 55.37,53.59 v64.21,53.59
N$26  (via drill 0.61)
  Top 0.254: IC4.16 16.51,55.12 18.49,57.1 v18.49,61.67 | v52.32,64.87 54,64.87 v54.61,64.26 | v61.01,58.62 61.01,55.58 66.65,49.94 66.65,48.87 SV2.7
  Bottom 0.254: v18.49,61.67 18.95,61.21 34.95,61.21 38.61,64.87 v52.32,64.87 | v54.61,64.26 54.61,61.06 58.57,61.06 v61.01,58.62
N$27  (via drill 0.61)
  Top 0.254: v60.55,61.52 60.55,59.39 60.1,58.93 60.1,54.2 SV2.8
  Bottom 0.254: v60.55,61.52 60.55,63.35 57.96,65.94 39.98,65.94 33.73,72.19 7.21,72.19 7.21,64.41 7.82,63.81 9.35,63.81 10.87,62.28 16.51,62.28 IC4.19
N$28  (via drill 0.61)
  Top 0.254: v79.91,43.84 79.91,36.83 83.72,33.02 IC1.4
  Bottom 0.254: v79.91,43.84 80.37,43.38 87.07,43.38 87.83,44.15 87.83,51 106.73,51 109.02,53.29 109.17,53.29 JP3.1
N$29  (via drill 0.61)
  Top 0.254: v83.11,34.85 83.11,37.44 82.96,37.59 v82.96,45.52 | v90.27,54.81 v85.39,49.94
  Bottom 0.254: v83.11,34.85 IC1.3 | v82.96,45.52 82.96,47.04 82.8,47.19 82.8,49.94 v85.39,49.94 | v90.27,54.81 103.38,54.81 103.83,55.27 104.75,55.27 JP3.2
N$30  (via drill 0.61)
  Top 0.254: v85.39,52.38 IC1.38
  Bottom 0.254: v85.39,52.38 96.67,52.38 97.59,53.29 104.14,53.29 JP3.3
N$31  (via drill 0.61)
  Top 0.254: v128.52,40.34 132.33,44.15 132.33,57.56 v123.19,66.7
  Bottom 0.254: v128.52,40.34 123.5,35.31 109.02,35.31 106.73,33.02 IC1.13 | v123.19,66.7 122.73,67.16 115.72,67.16 JP6.1
N$32  (via drill 0.61)
  Top 0.254: v93.62,22.81 98.96,17.48 110.24,17.48 111,16.71 111.3,16.71 IC7.37 | v75.49,27.99 71.83,31.65 69.85,31.65 SV3.1
  Bottom 0.254: v93.62,22.81 93.32,23.11 77.93,23.11 77.16,23.88 77.16,27.99 v75.49,27.99
N$33  (via drill 0.61)
  Top 0.254: v94.84,31.34 96.22,31.34 100.02,27.53 100.02,23.88 104.75,19.15 109.63,19.15 111.45,17.32 111.76,17.32 IC7.36
  Bottom 0.254: v94.84,31.34 72.75,31.34 69.85,34.24 SV3.2
N$34  (via drill 0.61)
  Top 0.254: v104.75,30.43 107.64,27.53 107.64,22.96 112.37,18.24 112.37,17.93 IC7.35 | v74.88,30.43 74.88,31.04 71.68,34.24 71.68,35 SV3.3
  Bottom 0.254: v104.75,30.43 94.54,30.43 94.23,30.73 75.18,30.73 v74.88,30.43
N$35  (via drill 0.61)
  Top 0.254: v109.32,3.15 111.76,5.59 IC7.9
  Bottom 0.254: v109.32,3.15 84.78,3.15 83.72,4.22 83.72,6.96 51.41,6.96 SV4.20
N$36  (via drill 0.61)
  Top 0.254: v83.87,2.24 109.63,2.24 112.37,4.98 IC7.10 | v53.85,3 53.85,3.3 SV4.19
  Bottom 0.254: v83.87,2.24 83.41,2.69 78.84,2.69 78.54,3 v53.85,3
N$37  (via drill 0.61)
  Top 0.254: v114.96,16.56 113.74,15.34 113.74,9.4 113.44,9.09 113.44,6.5 113.59,6.35 113.59,5.44 113.13,4.98 113.13,4.52 IC7.11
  Bottom 0.254: v114.96,16.56 114.96,19.15 101.09,19.15 99.72,20.52 92.71,20.52 90.27,18.09 60.25,18.09 48.36,6.2 48.36,3.15 52.78,3.15 54.61,4.98 SV4.18
N$38  (via drill 0.61)
  Top 0.254: v114.96,3.76 115.57,4.37 IC7.12 | v99.87,22.81 99.87,20.07 v99.42,19.61 | SV4.17 v59.94,7.87
  Bottom 0.254: v114.96,3.76 115.88,4.67 122.12,4.67 125.93,8.48 125.93,27.69 121.21,27.69 120.45,26.92 120.45,22.81 v99.87,22.81 | v99.42,19.61 97.43,17.63 69.7,17.63 v59.94,7.87
N$39  (via drill 0.61)
  Top 0.254: v114.35,6.81 116.03,5.13 IC7.13 | v91.19,10.01 v93.93,7.26 | v62.53,7.87 59.79,5.13 SV4.16
  Bottom 0.254: v114.35,6.81 113.44,7.72 94.39,7.72 v93.93,7.26 | v91.19,10.01 90.73,10.47 66.65,10.47 64.06,7.87 v62.53,7.87
N$40  (via drill 0.61)
  Top 0.254: v115.72,6.66 116.64,5.74 IC7.14 | v126.39,7.57 v124.56,9.4 | v99.26,5.44 99.26,5.89 96.52,8.64 93.78,8.64 91.49,10.92 90.88,10.92 89.51,9.55 74.57,9.55 70.92,5.89 70.92,3.91 69.7,2.69 64.21,2.69 62.23,4.67 SV4.15
  Bottom 0.254: v115.72,6.66 116.18,7.11 121.51,7.11 123.8,9.4 v124.56,9.4 | v126.39,7.57 122.73,3.91 116.33,3.91 115.27,2.85 110.85,2.85 109.63,4.06 101.85,4.06 101.55,3.76 100.94,3.76 v99.26,5.44
N$41  (via drill 0.61)
  Top 0.254: v114.66,12.14 114.66,9.09 117.25,6.5 117.25,6.2 IC7.15 | v90.12,11.38 89.2,10.47 70.16,10.47 SV4.14
  Bottom 0.254: v114.66,12.14 114.2,11.68 105.66,11.68 104.75,12.6 91.34,12.6 v90.12,11.38
N$42  (via drill 0.61)
  Top 0.254: v115.57,10.47 115.57,9.4 117.7,7.26 117.7,6.81 IC7.16 | v71.83,9.55 67.41,5.13 SV4.13
  Bottom 0.254: v115.57,10.47 107.64,10.47 106.27,9.09 79.15,9.09 78.69,9.55 v71.83,9.55
N$43  (via drill 0.61)
  Top 0.254: v121.06,5.59 117.55,2.08 116.48,2.08 115.88,2.69 115.88,3.3 119.99,7.42 119.99,7.72 119.69,8.03 119.69,8.33 IC7.19 | v63.75,8.79 63.75,6.35 63.6,6.2 63.6,3.91 64.36,3.15 68.02,3.15 69.85,4.98 SV4.12
  Bottom 0.254: v121.06,5.59 121.51,6.05 122.89,6.05 125.48,8.64 125.48,13.21 106.73,13.21 104.9,15.04 70,15.04 v63.75,8.79
N$44  (via drill 0.61)
  Top 0.254: v121.21,8.03 121.06,8.03 120.14,8.94 IC7.20 | SV4.11 v75.18,7.87
  Bottom 0.254: v121.21,8.03 121.06,8.18 79.15,8.18 78.69,7.72 75.34,7.72 v75.18,7.87
N$45  (via drill 0.61)
  Top 0.254: v119.69,10.62 120.6,9.7 IC7.21 | v78.38,8.64 74.88,5.13 SV4.10
  Bottom 0.254: v119.69,10.62 119.69,8.64 114.5,8.64 114.2,8.94 113.28,8.94 112.98,8.64 v78.38,8.64
N$46  (via drill 0.61)
  Top 0.254: v116.79,3 120.29,6.5 120.9,6.5 122.12,7.72 122.12,8.94 121.36,9.7 121.36,10.01 IC7.22
  Bottom 0.254: v116.79,3 116.03,2.24 85.09,2.24 84.18,3.15 79.3,3.15 77.47,4.98 SV4.9
N$47
  Top 0.254: IC7.23 121.36,12.6 121.36,11.53 123.04,9.86 123.04,5.13 119.08,1.17 83.72,1.17 79.91,4.98 SV4.8
N$48  (via drill 0.61)
  Top 0.254: v118.77,2.08 122.58,5.89 122.58,9.7 120.14,12.14 120.14,12.45 120.6,12.9 120.6,13.21 IC7.24 | v78.23,2.08 78.23,3.61 78.84,4.22 78.84,6.2 79.6,6.96 80.67,6.96 SV4.7
  Bottom 0.254: v118.77,2.08 118.01,1.32 78.99,1.32 v78.23,2.08
N$49  (via drill 0.61)
  Top 0.254: v118.47,12.29 119.99,13.82 IC7.25 | v105.21,10.92 105.21,10.47 101.85,7.11 101.85,6.5 98.5,3.15 92.41,3.15 91.34,4.22 91.34,6.2 90.58,6.96 86.92,6.96 85.09,5.13 SV4.6
  Bottom 0.254: v118.47,12.29 117.55,11.38 115.11,11.38 114.66,10.92 v105.21,10.92
N$50  (via drill 0.61)
  Top 0.254: v123.95,8.33 123.65,8.64 123.65,11.84 120.6,14.88 120.14,14.88 119.69,14.43 IC7.26 | v101.24,4.67 100.64,4.67 98.65,2.69 89.97,2.69 87.68,4.98 SV4.5
  Bottom 0.254: v123.95,8.33 122.12,6.5 116.79,6.5 114.96,4.67 v101.24,4.67
N$51  (via drill 0.61)
  Top 0.254: v105.97,10.01 106.88,9.09 107.34,9.09 107.8,9.55 IC7.2 | v95.15,10.01 94.08,11.07 94.08,15.34 SV5.1
  Bottom 0.254: v95.15,10.01 v105.97,10.01
N$52  (via drill 0.61)
  Top 0.254: v106.27,6.81 108.41,8.94 IC7.3 | v100.94,6.81 96.37,11.38 96.37,12.9 95.3,13.97 SV5.3
  Bottom 0.254: v100.94,6.81 v106.27,6.81
N$53  (via drill 0.61)
  Top 0.254: v114.05,17.32 113.13,18.24 IC7.34 | v99.42,18.39 95,22.81 v95,28.6 | v88.44,28.91 84.78,32.56 84.78,36.98 v83.87,37.9
  Bottom 0.254: v114.05,17.32 112.98,18.39 v99.42,18.39 | v95,28.6 94.69,28.91 v88.44,28.91 | v83.87,37.9 83.11,38.66 70.46,38.66 69.85,39.27 SV3.4
N$54  (via drill 0.61)
  Top 0.254: v106.12,12.6 107.34,11.38 107.34,10.16 IC7.1
  Bottom 0.254: v106.12,12.6 104.75,13.97 SV5.4
N$55  (via drill 0.61)
  Top 0.254: v113.89,20.07 115.57,18.39 IC7.33 | v106.43,20.07 102.62,23.88 102.62,27.38 97.59,32.41 v97.59,34.54 | v73.51,34.85 73.51,38.2 69.85,41.86 SV3.5
  Bottom 0.254: v106.43,20.07 v113.89,20.07 | v97.59,34.54 95.76,36.37 82.8,36.37 82.35,36.83 80.82,36.83 78.84,34.85 v73.51,34.85
N$56  (via drill 0.61)
  Top 0.254: v115.11,21.9 116.64,20.37 116.64,18.39 116.18,17.93 IC7.32 | v69.7,22.35 68.63,22.35 67.11,23.88 v67.11,30.43 | v66.65,42.93 v66.65,33.33
  Bottom 0.254: v115.11,21.9 92.56,21.9 92.1,22.35 v69.7,22.35 | v67.11,30.43 67.11,33.33 v66.65,33.33 | v66.65,42.93 68.17,44.45 SV3.6
N$57  (via drill 0.61)
  Top 0.254: v118.47,19.46 118.47,19.3 116.79,17.63 116.79,17.32 IC7.31 | v122.43,22.81 122.89,23.27 122.89,29.97 120.45,32.41 120.45,41.25 v118.31,43.38
  Bottom 0.254: v118.47,19.46 121.82,22.81 v122.43,22.81 | v118.31,43.38 117.86,42.93 74.27,42.93 70.31,46.89 69.85,46.89 SV3.7
N$58  (via drill 0.61)
  Top 0.254: v119.08,18.39 117.4,16.71 IC7.30 | v83.26,21.44 79.6,21.44 77.16,23.88 77.16,29.36 72.14,34.39 v72.14,36.83 | v62.69,38.66 62.69,45.36 62.84,45.52 62.84,47.96 v63.14,48.26
  Bottom 0.254: v119.08,18.39 118.92,18.54 116.64,18.54 114.2,20.98 92.56,20.98 92.1,20.52 88.29,20.52 87.38,21.44 v83.26,21.44 | v72.14,36.83 70.76,38.2 63.14,38.2 v62.69,38.66 | v63.14,48.26 63.3,48.41 68.78,48.41 69.85,49.48 SV3.8
N$59  (via drill 0.61)
  Top 0.254: v123.19,36.22 v123.19,31.8 | v128.52,41.55 128.52,48.72 131.88,52.07 131.88,56.79 v123.19,65.48
  Bottom 0.254: IC1.12 105.82,31.34 122.73,31.34 v123.19,31.8 | v128.52,41.55 v123.19,36.22 | v123.19,65.48 114.96,65.48 113.13,67.31 JP6.2
N$60  (via drill 0.61)
  Top 0.254: v101.7,36.37 101.7,33.02 IC1.11 | v105.05,39.57 105.05,42.32 v103.53,43.84 | v110.39,56.79 110.39,62.13 109.47,63.04 109.47,66.4 110.39,67.31 JP6.3
  Bottom 0.254: v101.7,36.37 104.9,39.57 v105.05,39.57 | v103.53,43.84 105.05,45.36 108.41,45.36 110.39,47.35 v110.39,56.79
N$61  (via drill 0.61)
  Top 0.254: v97.74,40.95 98.96,39.73 98.96,33.02 IC1.10 | v111.3,41.55 111.3,42.62 v107.64,46.28 | v107.95,51 106.73,51 105.21,52.53 105.21,54.51 103.68,56.03 102.62,56.03 99.26,59.39 99.26,60 104.75,65.48 106.12,65.48 JP6.4
  Bottom 0.254: v97.74,40.95 98.35,41.55 v111.3,41.55 | v107.64,46.28 107.64,51 v107.95,51
N$62  (via drill 0.61)
  Top 0.254: v82.04,35.92 82.04,42.93 v79.45,45.52 | v77.77,49.94 77.77,51.31 80.06,53.59 80.37,53.59 81.74,54.97 v81.74,68.22
  Bottom 0.254: IC1.9 93.62,35.92 v82.04,35.92 | v79.45,45.52 77.77,47.19 v77.77,49.94 | v81.74,68.22 83.11,69.6 97.74,69.6 99.26,68.07 99.26,65.48 103.53,65.48 105.36,67.31 JP6.5
N$63
  Bottom 0.254: IC1.8 94.08,33.02 94.84,32.26 95.15,32.26 96.06,31.34 105.21,31.34 105.66,30.89 124.41,30.89 131.88,38.35 131.88,61.52 130.05,61.52 125.17,66.4 125.17,71.12 106.73,71.12 102.92,67.31 JP6.6
N$64  (via drill 0.61)
  Top 0.254: v83.87,44.3 83.87,40.49 91.34,33.02 IC1.7 | v82.19,51.92 v80.21,49.94 | v86,56.03 86.61,56.03 96.06,65.48 98.5,65.48 JP6.7
  Bottom 0.254: v83.87,44.3 83.57,44.6 82.65,44.6 80.21,47.04 v80.21,49.94 | v82.19,51.92 82.19,54.81 84.78,54.81 v86,56.03
N$65  (via drill 0.61)
  Top 0.254: IC1.6 88.9,34.7 84.48,39.12 v83.87,39.12 | v73.51,39.57 73.51,45.67 70.76,48.41 68.63,48.41 68.02,49.02 68.02,57.25 75.18,64.41 75.18,65.18 v78.08,68.07
  Bottom 0.254: v83.87,39.12 83.41,39.57 v73.51,39.57 | v78.08,68.07 78.84,67.31 JP6.8
N$66
  Top 0.254: IC1.21 125.78,48.26 130.81,53.29 JP7.1
N$67  (via drill 0.61)
  Top 0.254: v127.76,36.22 127.76,39.12 123.5,43.38 123.5,49.33 125.63,51.46 126.39,51.46 JP7.2
  Bottom 0.254: v127.76,36.22 124.56,33.02 IC1.20
N$68  (via drill 0.61)
  Top 0.254: v121.97,36.22 121.97,33.02 IC1.19
  Bottom 0.254: v121.97,36.22 125.32,39.57 125.63,39.57 126.24,40.18 126.24,53.29 125.78,53.29 JP7.3
N$69  (via drill 0.61)
  Top 0.254: IC1.18 119.38,41.1 v115.88,44.6 | v120.14,50.24 123.19,53.29 JP7.4
  Bottom 0.254: v115.88,44.6 115.88,50.24 v120.14,50.24
N$70
  Bottom 0.254: JP7.5 122.58,55.27 129.44,55.27 129.44,39.27 125.02,34.85 118.77,34.85 116.94,33.02 IC1.17
N$71  (via drill 0.61)
  Top 0.254: v111.15,37.44 111.76,37.44 114.2,35 114.2,33.02 IC1.16 | v113.28,45.97 v113.28,39.57
  Bottom 0.254: v113.28,39.57 v111.15,37.44 | v113.28,45.97 113.28,51.46 113.44,51.46 114.5,52.53 114.5,55.27 116.18,55.27 JP7.6
N$72  (via drill 0.61)
  Top 0.254: v111.76,36.22 IC1.15
  Bottom 0.254: v111.76,36.22 115.57,40.03 125.48,40.03 125.78,40.34 125.78,51.46 117.4,51.46 115.57,53.29 JP7.7
N$73  (via drill 0.61)
  Top 0.254: v104.75,43.84 109.17,39.42 109.17,33.02 IC1.14
  Bottom 0.254: v104.75,43.84 105.82,44.91 110.54,44.91 112.83,47.19 112.83,53.29 112.98,53.29 JP7.8
N$114
  Top 0.254: JP5.1 109.17,58.47 106.73,58.47 JP5.2 106.58,58.47 104.14,58.47 JP5.3
  Bottom 0.254: R7.2 97.89,63.5 102.92,58.47 104.14,58.47 JP5.3 | R8.1 119.38,57.25 118.31,58.32 109.32,58.32 JP5.1
N$115
  Bottom 0.254: R8.2 119.38,69.75 118.77,69.14 110.08,69.14 109.02,68.07 109.02,65.02 93.02,65.02 91.95,66.09 85.09,66.09 83.87,64.87 C16.+
N$116
  Top 0.254: C16.- 76.25,62.28 76.25,62.13 72.75,58.62 72.44,58.62 71.37,57.56 71.37,56.79 72.29,55.88 72.29,54.66 IC16.3
N$117  (via drill 0.61)
  Top 0.254: v77.16,61.98 77.16,60 IC16.7
  Bottom 0.254: C18.1 63.3,66.24 72.9,66.24 v77.16,61.98
N$126
  Bottom 0.254: IC16.8 79.91,59.69 78.99,60.6 72.9,60.6 72.75,60.76 69.7,60.76 68.63,59.69 C19.-
N$127
  Top 0.254: IC16.1 72.44,59.69 72.44,61.06 76.1,64.72 R9.2
N$128
  Top 0.254: R9.1 63.6,64.72 63.6,59.69 C19.+
N$129
  Bottom 0.254: C20.- 91.64,64.57 122.12,64.57 X1.1
N$130
  Top 0.254: IC16.5 80.06,52.07 80.06,52.68 82.19,54.81 82.19,61.37 85.55,64.72 86.31,64.72 C20.+ 86.31,64.87 81.43,69.75 70.92,69.75 69.85,68.68 68.63,68.68 C21.1
N$133
  Top 0.254: C21.2 71.22,68.53 73.66,68.53 R10.1
PHI2  (via drill 0.61)
  Top 0.254: v96.52,40.95 92.56,36.98 92.56,32.11 91.49,31.04 91.49,26.77 U$2.P$14 | v121.21,45.06 121.21,47.65 121.82,48.26 IC1.22
  Bottom 0.254: v96.52,40.95 98.04,42.47 118.62,42.47 v121.21,45.06
RWB  (via drill 0.61)
  Top 0.254: v83.57,19.61 87.38,23.42 87.38,25.71 88.29,26.62 88.9,26.62 U$2.P$13
  Bottom 0.254: v83.57,19.61 83.11,20.07 9.96,20.07 6.45,23.57 6.45,24.03 JP1.17
VCC  (via drill 0.61)
  Top 0.508: IC4.20 16.51,65.33 19.1,67.92 36.17,67.92 | IC2.14 36.17,67.92 | U$2.P$1 58.42,31.34 59.64,32.56 59.64,36.98 56.44,40.18 | 56.44,40.18 55.83,40.79 49.43,40.79 48.36,41.86 IC3.14 | 36.17,67.92 36.32,67.77 36.32,58.62 38.15,56.79 38.15,44.6 35.56,42.01 IC5.14 | IC7.17 117.55,8.18 117.55,13.51 118.16,14.12 | 118.16,14.12 118.92,14.88 IC7.27 | 117.25,15.49 117.7,15.95 IC7.29 | 117.25,15.49 117.25,15.04 118.16,14.12 | IC7.5 109.78,8.03 111.76,10.01 111.76,15.04 110.85,15.95 IC7.38 110.69,16.26 110.08,16.87 107.95,16.87 107.64,16.56 97.89,16.56 SV5.2 | 117.25,15.49 115.88,15.49 v115.72,15.65 | IC16.6 76.25,50.85 76.25,48.26 IC1.40 76.4,48.11 78.08,46.43 104.6,46.43 106.27,48.11 106.58,48.11 IC1.28 107.04,48.26 108.86,46.43 112.37,46.43 114.2,48.26 IC1.25 114.5,48.11 116.18,46.43 116.64,46.43 125.63,37.44 125.63,23.27 v125.02,22.66 | 56.44,40.18 62.23,45.97 v62.23,50.55
  Bottom 0.508: IC6.20 23.98,40.79 34.49,40.79 35.56,41.86 IC5.14 35.71,41.71 36.63,40.79 47.14,40.79 IC3.14 | SV5.2 98.65,15.65 v115.72,15.65 117.55,17.48 119.84,17.48 v125.02,22.66 | v62.23,50.55 64.36,52.68 70.16,52.68 74.57,48.26 IC1.40
VSS  (via drill 0.61)
  Top 0.508: 112.52,9.7 112.67,9.86 v112.67,14.12 | 112.52,9.7 110.24,7.42 IC7.6 | v110.85,14.12 110.85,14.88 IC7.39 109.63,16.1 108.25,16.1 103.68,11.53 97.89,11.53 SV5.6 | v118.47,9.55 118.31,9.4 118.31,8.64 118.92,8.03 IC7.18 | v112.67,9.55 112.52,9.7 | X1.2@2 128.68,63.5 123.19,68.99 X1.2@1 123.5,68.38 121.67,66.55 121.67,58.01 X1.2 123.19,57.86 121.67,57.86 119.84,56.03 116.79,56.03 | IC7.28 118.47,15.65 v119.38,16.56 124.56,21.74 126.54,21.74 128.07,23.27 128.07,26.31 127.76,26.62 127,26.62 U$2.P$32 126.85,26.77 126.85,38.05 116.79,48.11 IC1.24 116.79,48.26 116.79,50.09 | R2.1 R1.1 100.48,51.92 103.07,51.92 104.9,50.09 116.79,50.09 | 116.79,56.03 116.79,57.25 110.54,63.5 R7.1 | 116.79,56.03 116.79,50.09 | v18.49,65.94 24.13,65.94 24.44,66.24 29.01,66.24 IC6.10 30.53,64.57 35.41,59.69 35.41,57.25 IC5.8 IC5.9 35.71,54.51 37.39,52.83 37.39,51.61 35.71,49.94 35.71,49.63 IC5.11 IC5.12 | IC3.13 48.36,44.45 48.36,44.91 50.04,46.58 50.04,47.8 48.36,49.48 IC3.11 48.06,49.63 48.06,50.09 46.53,51.61 46.53,54.66 | 46.53,54.66 45.62,54.66 43.18,57.1 IC5.7 | 46.53,54.66 48.21,54.66 IC3.9 48.36,54.81 53.85,60.3 | IC16.2 73.51,56.03 73.51,54.2 72.44,53.14 72.44,52.07 IC16.4 72.59,51.92 75.03,49.48 75.03,41.71 76.1,40.64 76.1,33.02 IC1.1 | 53.85,60.3 53.39,60.76 53.39,62.13 IC2.7 53.54,61.52 56.44,61.52 C18.2 66.34,71.43 81.13,71.43 83.87,68.68 86.31,68.68 R10.2 | 53.85,60.3 55.83,58.32 55.83,57.25 IC3.7
  Bottom 0.508: v110.85,14.12 v112.67,14.12 113.28,14.73 117.55,14.73 v119.38,16.56 | v112.67,9.55 v118.47,9.55 | v18.49,65.94 9.96,65.94 8.89,64.87 IC4.1 | IC5.8 35.56,57.1 43.18,57.1 IC5.7 | IC16.2 72.29,57.1 55.98,57.1 IC3.7 | R2.1 97.74,52.07 97.28,51.61 86,51.61 85.39,51 73.51,51 72.44,52.07 IC16.4

## Text on the board
Top: REICHEL R8 | 6502 MICROCOMPUTER | (C) 2014-2017 A.J.Reichel | R8 EXPANSION BOARD